# EAGLE board OBCv4.21 (EAGLE 9.6.2)
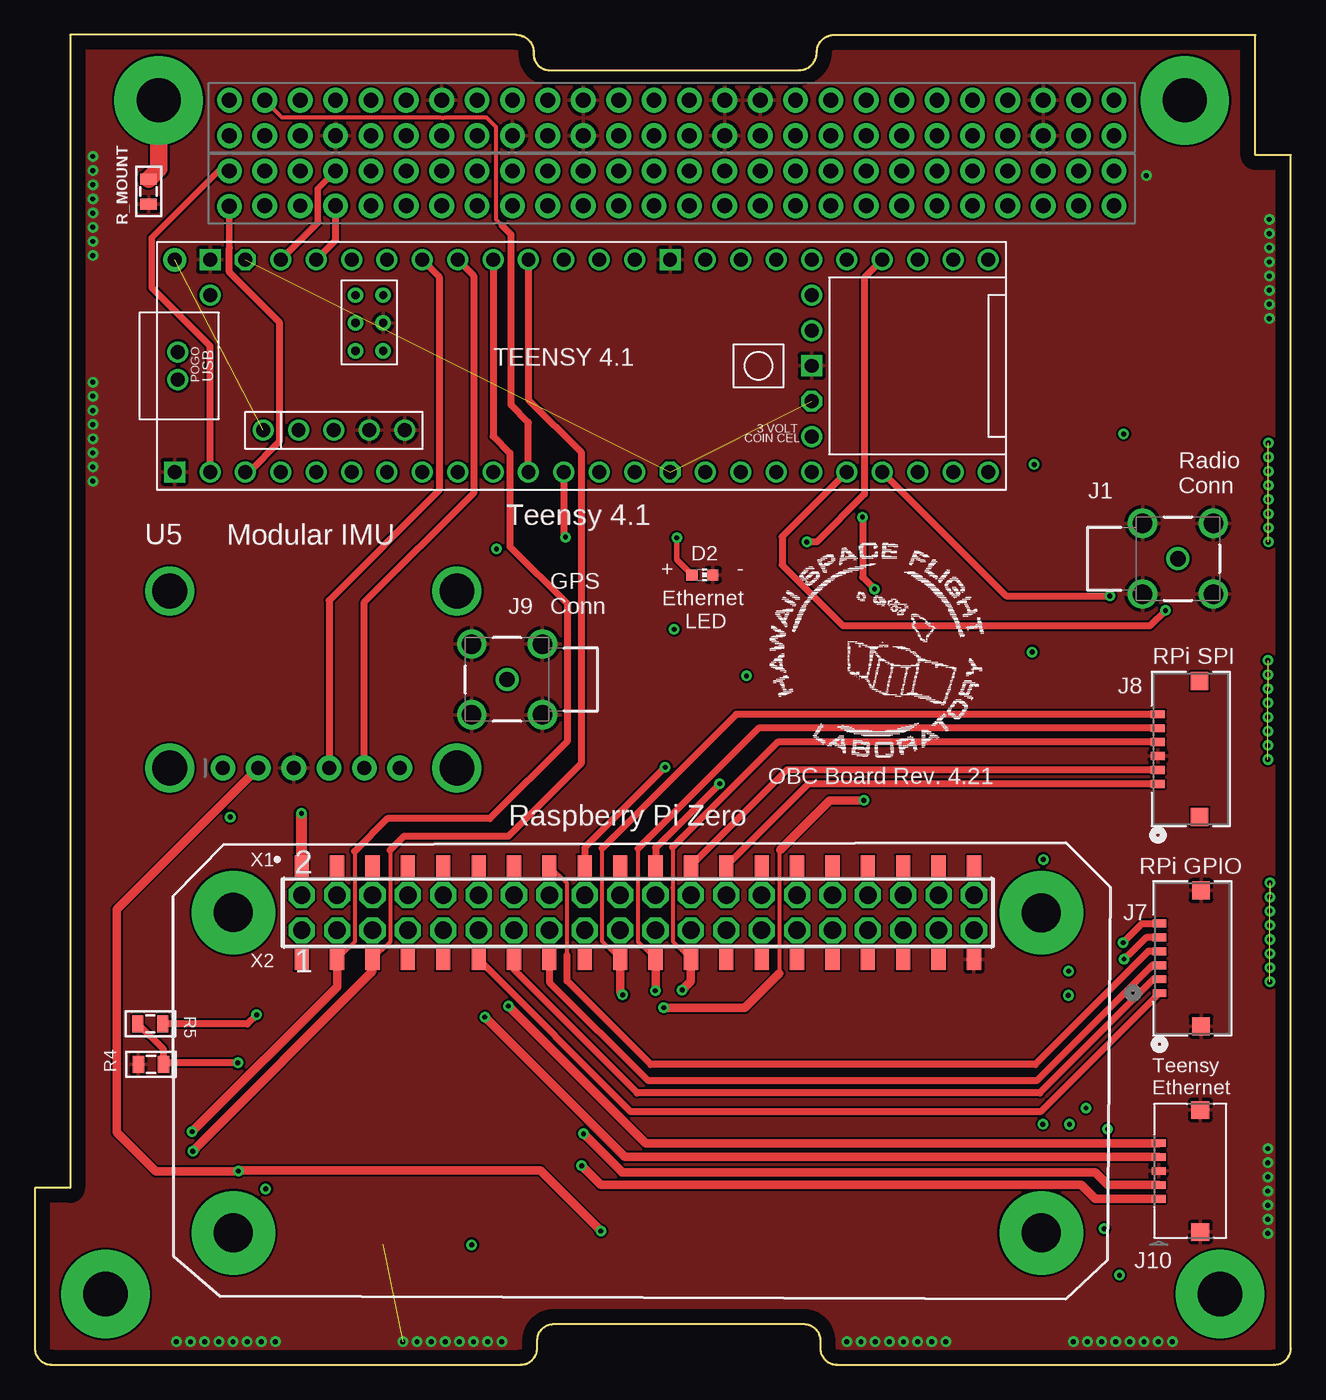
[diagram p0: board, top side]
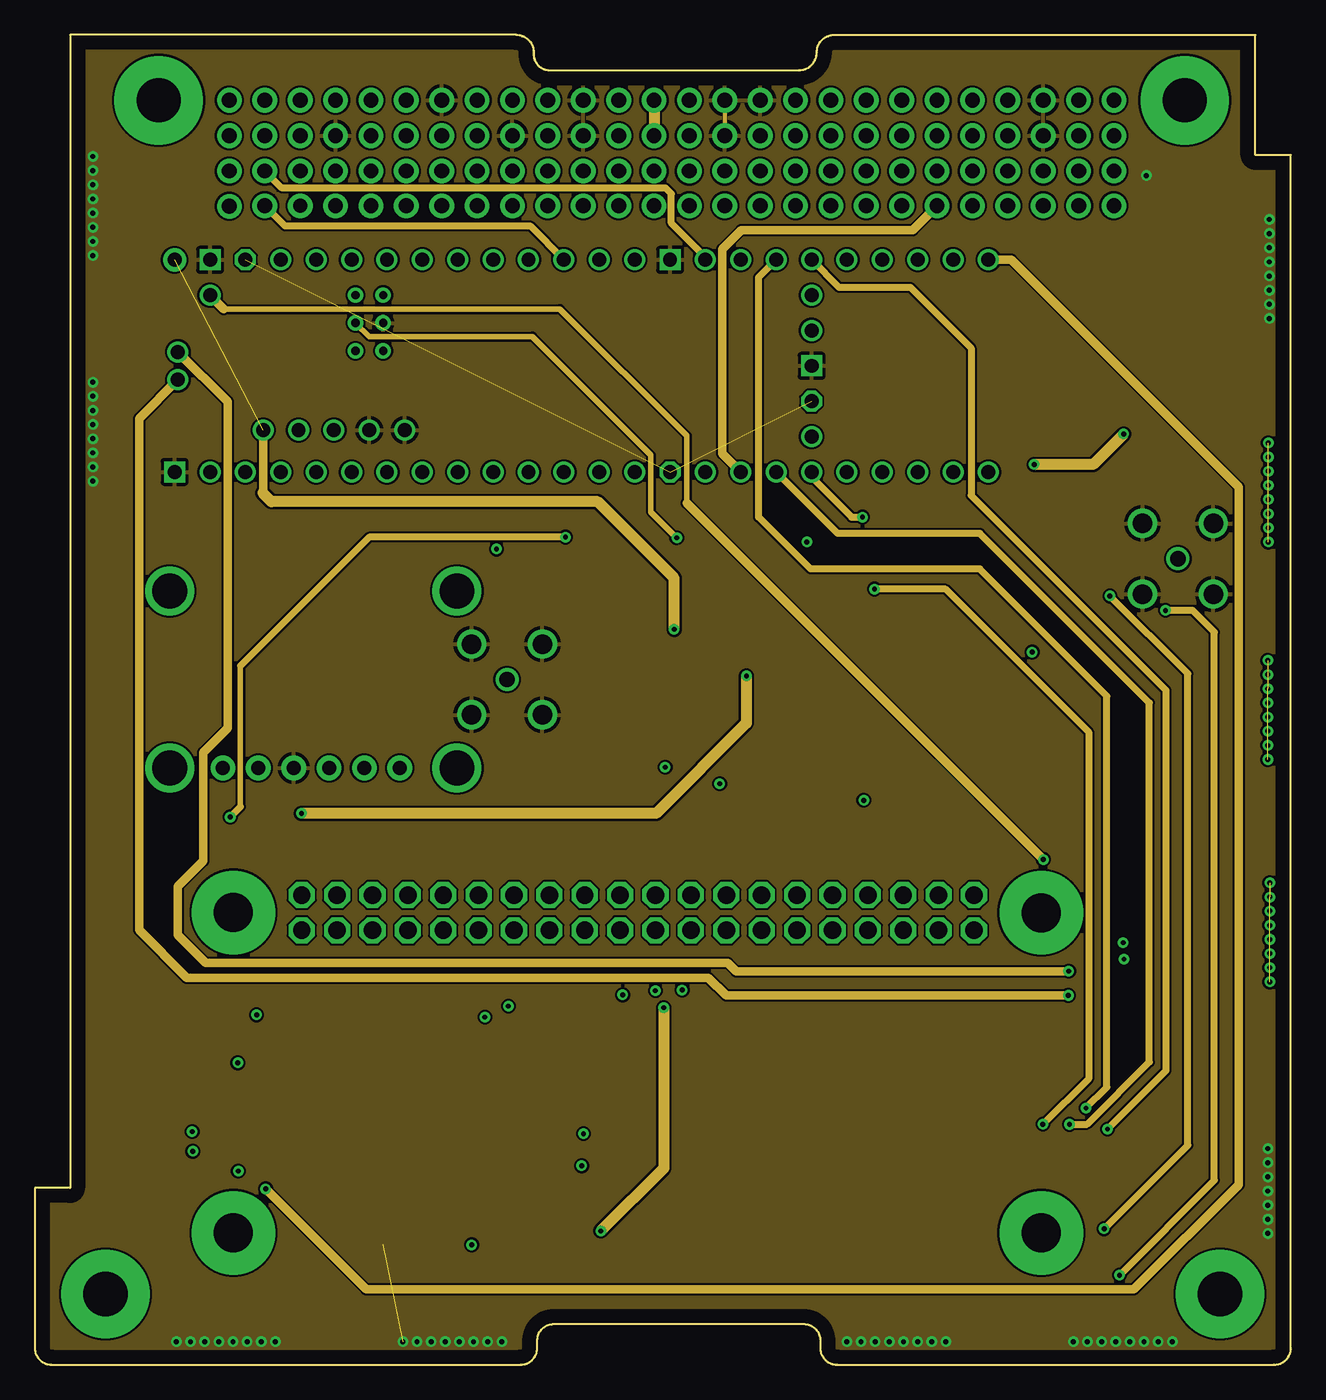
[diagram p1: board, inner layer Route2]
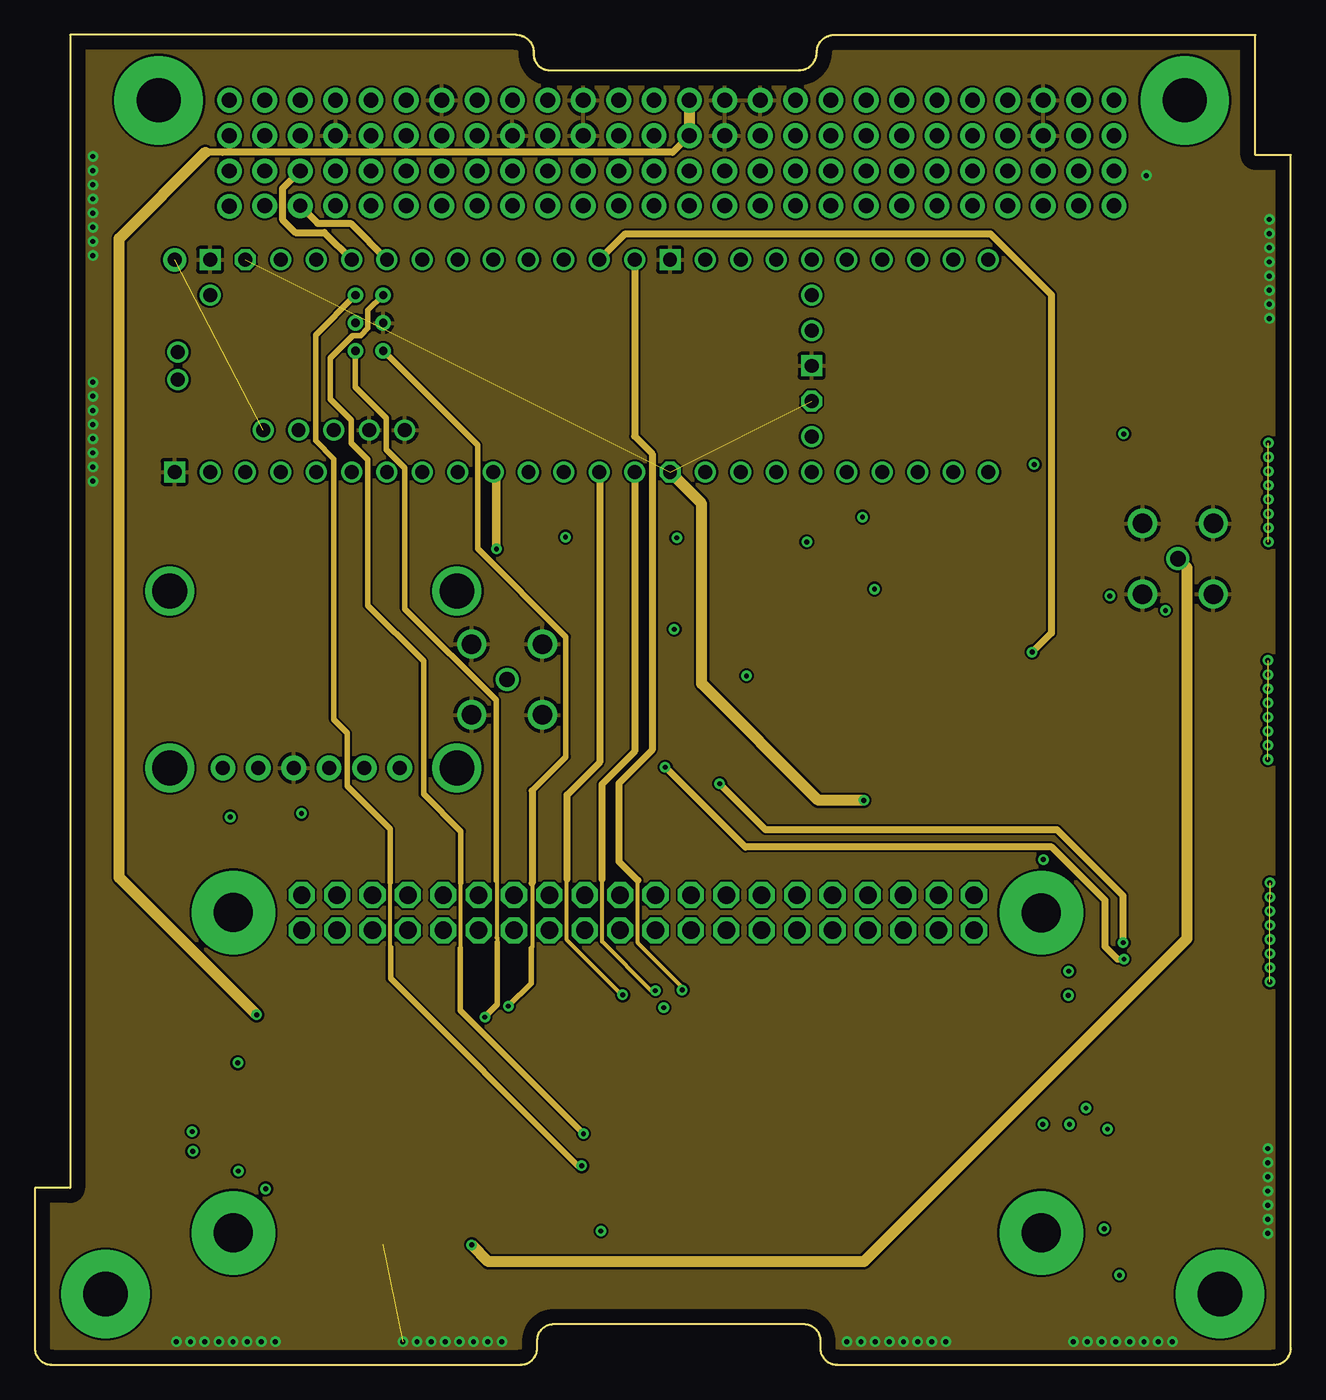
[diagram p2: board, inner layer Route15]
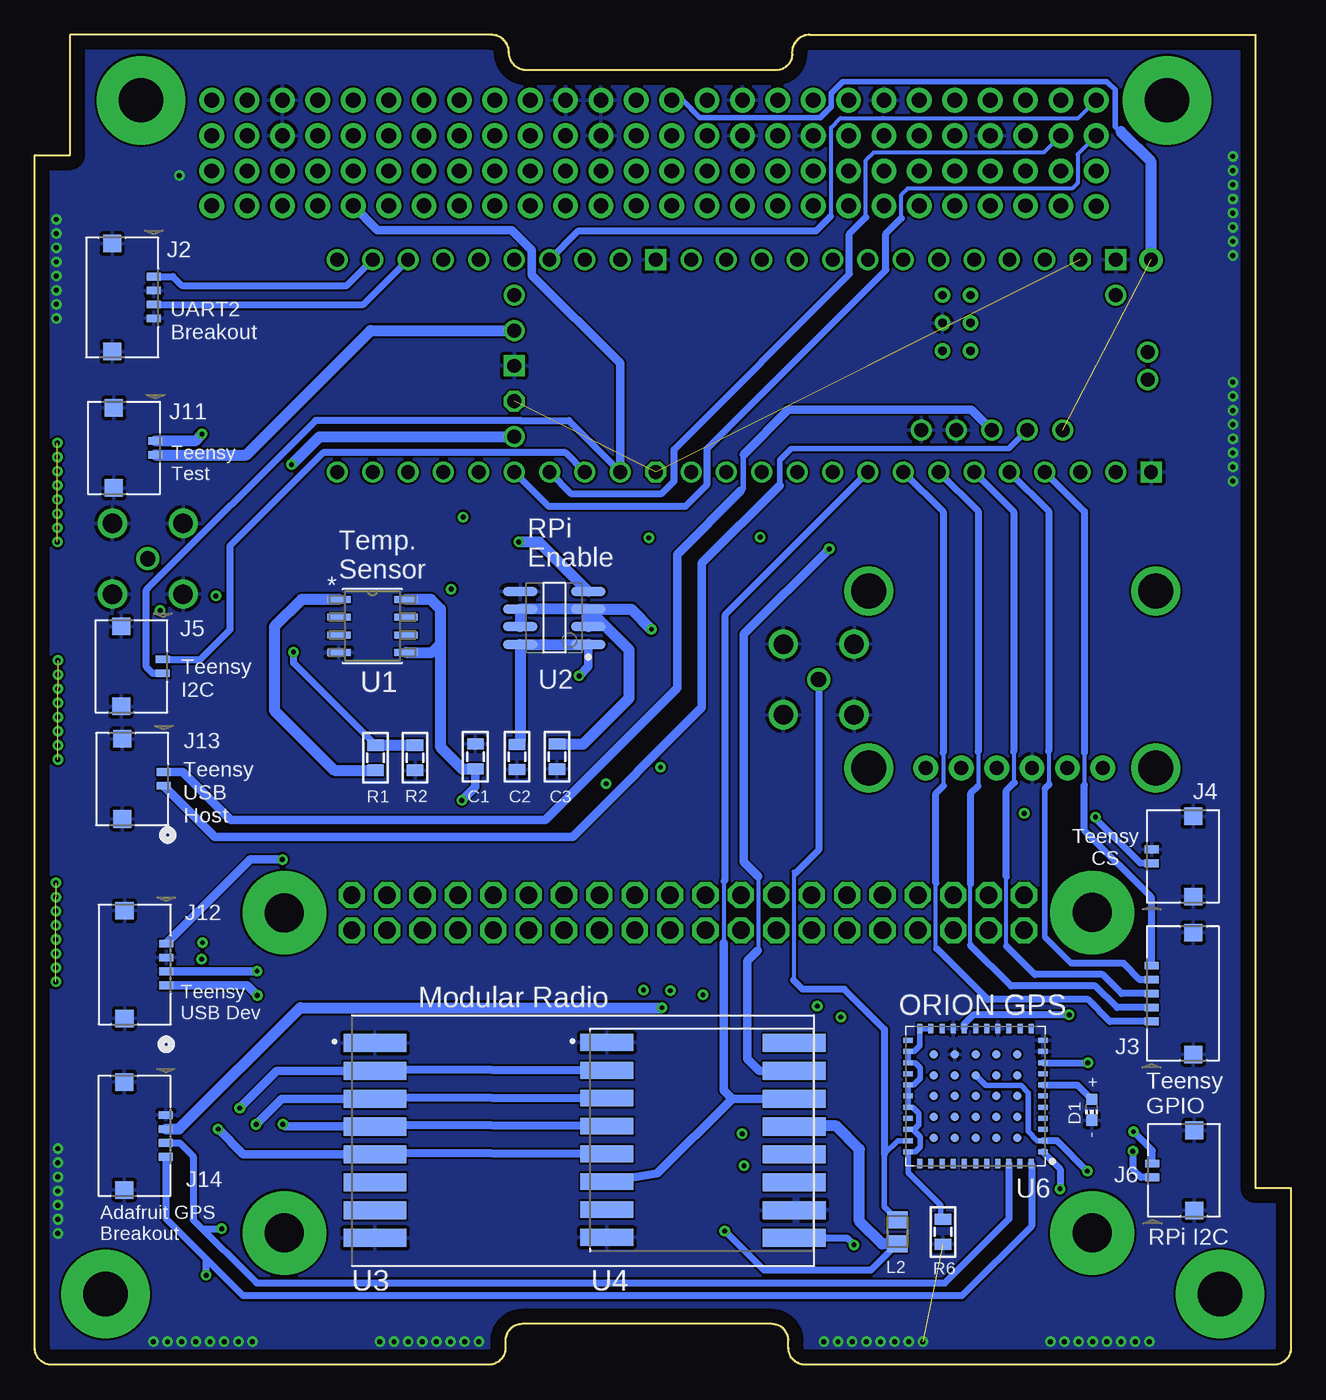
[diagram p3: board, bottom side, seen from below]

Size 90.17 x 95.5 mm. Coordinates in mm from the lower left corner, seen from the top.
Copper layers (1+2*15+16): Top 0.035mm / dielectric 1.5mm / Route2 0.035mm / dielectric 0.15mm / Route15 0.035mm / dielectric 0.2mm / Bottom 0.035mm
Design rules "default *": minimum track width 6mil, minimum drill 8mil, track to track 6mil, track to pad 6mil, pad to pad 6mil, via to via 6mil, smd to smd 6mil, copper to edge 40mil, drill to drill 6mil, minimum pad ring 10mil, minimum via ring 8mil, stop-mask expansion 4mil, vias tented up to drill 0mil, thermal gap 10mil
Net classes: 1 highpower: width 0.406 mm, drill 0.483 mm; 2 lowpower: width 0.305 mm, drill 0.483 mm

## Footprints (pad centres in the part's own frame; a part is rotated, then mirrored left to right if it is on the bottom)
0805 = smd 0.8 x 1.2: 1 -0.9,0; 2 0.9,0
CHIP-LED0603 = smd 0.8 x 0.8: A 0,-0.75; C 0,0.75
PC104_WCONN = drill 1.067 pad 1.778: 1.1 13.97,83.185; 1.2 13.97,85.725; 1.3 16.51,83.223; 1.4 16.51,85.725; 1.6 19.05,85.725; 1.7 21.59,83.223; 1.8 21.59,85.725; 1.9 24.13,83.223; 1.10 24.13,85.725; 1.11 26.67,83.223; 1.12 26.67,85.725; 1.13 29.21,83.223; 1.14 29.21,85.725; 1.15 31.75,83.223; 1.16 31.75,85.725; 1.17 34.29,83.223; 1.18 34.29,85.725; 1.19 36.83,83.223; 1.20 36.83,85.725; 1.21 39.37,83.223; 1.22 39.37,85.725; 1.23 41.91,83.223; 1.24 41.91,85.725; 1.25 44.45,83.223; 1.26 44.45,85.725; 1.27 46.99,83.223; 1.28 46.99,85.725; 1.29 49.53,83.223; 1.30 49.53,85.725; 1.31 52.07,83.223; 1.32 52.07,85.725; 1.33 54.61,83.223; 1.34 54.61,85.725; 1.35 57.15,83.223; 1.36 57.15,85.725; 1.37 59.69,83.223; 1.38 59.69,85.725; 1.39 62.23,83.223; 1.40 62.23,85.725; 1.41 64.77,83.223; 1.42 64.77,85.725; 1.43 67.31,83.223; 1.44 67.31,85.725; 1.45 69.85,83.223; 1.46 69.85,85.725; 1.47 72.39,83.223; 1.48 72.39,85.725; 1.49 74.93,83.223; 1.50 74.93,85.725; 1.51 77.47,83.223; 1.52 77.47,85.725; 2.1 13.97,88.265; 2.2 13.97,90.805; 2.3 16.51,88.265; 2.4 16.51,90.805; 2.5 19.05,88.265; 2.6 19.05,90.805; 2.7 21.59,88.265; 2.8 21.59,90.805; 2.9 24.13,88.265; 2.10 24.13,90.805; 2.11 26.67,88.265; 2.12 26.67,90.805; 2.13 29.21,88.265; 2.14 29.21,90.805; 2.15 31.75,88.265; 2.16 31.75,90.805; 2.17 34.29,88.265; 2.18 34.29,90.805; 2.19 36.83,88.265; 2.20 36.83,90.805; 2.21 39.37,88.265; 2.22 39.37,90.805; 2.23 41.91,88.265; 2.24 41.91,90.805; 2.25 44.45,88.265; 2.26 44.45,90.805; 2.27 46.99,88.265; 2.28 46.99,90.805; 2.29 49.53,88.265; 2.30 49.53,90.805; 2.31 52.07,88.265; 2.32 52.07,90.805; 2.33 54.61,88.265; 2.34 54.61,90.805; 2.35 57.15,88.265; 2.36 57.15,90.805; 2.37 59.69,88.265; 2.38 59.69,90.805; 2.39 62.23,88.265; 2.40 62.23,90.805; 2.41 64.77,88.265; 2.42 64.77,90.805; 2.43 67.31,88.265; 2.44 67.31,90.805; 2.45 69.85,88.265; 2.46 69.85,90.805; 2.47 72.39,88.265; 2.48 72.39,90.805; 2.49 74.93,88.265; 2.50 74.93,90.805; 2.51 77.47,88.265; 2.52 77.47,90.805 | drill 1.016 pad 1.778: 1.5 19.05,83.223 | drill 3.175 pad 6.35: P$1 5.08,5.08; P$2 85.09,5.08; P$3 82.55,90.805; P$4 8.89,90.805
SAMTEC_MCX-J-P-H-RA-TH1 = drill 1.1: 1 0,0 | drill 1.4: S1 -2.54,2.54; S2 2.54,2.54; S3 2.54,-2.54; S4 -2.54,-2.54
CON_5037630491 = smd 0.55 x 1: 1 0,0; 2 -1,0; 3 -2,0; 4 -3,0 | smd 1.26 x 1.3: 5 2.375,2.99; 6 -5.38,2.99
CON_5037630591 = smd 0.55 x 1: 1 0,0; 2 -1,0; 3 -2,0; 4 -3,0; 5 -4,0 | smd 1.26 x 1.3: 6 2.375,2.99; 7 -6.38,2.99
CON_5037630291 = smd 0.55 x 1: 1 0,0; 2 -1,0 | smd 1.26 x 1.3: 3 2.375,2.99; 4 -3.38,2.99
CONN_503763-0691_MOL = smd 0.559 x 0.991: 1 2.5,-2.368; 2 1.5,-2.368; 3 0.5,-2.368; 4 -0.5,-2.368; 5 -1.5,-2.368; 6 -2.5,-2.368 | smd 1.295 x 1.27: 7 -4.875,0.622; 8 4.875,0.622
INDC2012X105N = smd 1.2 x 1.47: 1 -0.86,0; 2 0.86,0
R_8_ADI-L = smd 1.676 x 0.508: 1 -2.413,1.905; 2 -2.413,0.635; 3 -2.413,-0.635; 4 -2.413,-1.905; 5 2.413,-1.905; 6 2.413,-0.635; 7 2.413,0.635; 8 2.413,1.905
LINEAR_TECHNOLOGY_LTC1477CS8_2 = smd 2.5 x 0.7: 1 -2.45,1.905; 2 -2.45,0.635; 3 -2.45,-0.635; 4 -2.45,-1.905; 5 2.45,-1.905; 6 2.45,-0.635; 7 2.45,0.635; 8 2.45,1.905
RFM23BP = smd 4.5 x 1.3: 1 -14.55,7; 2 -14.55,5; 3 -14.55,3; 4 -14.55,1; 5 -14.55,-1; 6 -14.55,-3; 7 -14.55,-5; 8 -14.55,-7; 9 15.55,-7; 10 15.55,-5; 11 15.55,-3; 12 15.55,-1; 13 15.55,1; 14 15.55,3; 15 15.55,5; 16 15.55,7
RFM69HCW = smd 3.8 x 1.2: 1 1.8,15.55; 2 1.8,13.55; 3 1.8,11.55; 4 1.8,9.55; 5 1.8,7.55; 6 1.8,5.55; 7 1.8,3.55; 8 1.8,1.55; 9 15.5,1.55; 10 15.5,3.55; 11 15.5,5.55; 12 15.5,7.55; 13 15.5,9.55; 14 15.5,11.55; 15 15.5,13.55; 16 15.5,15.55
1X06_ROUND_70 = drill 1 pad 1.778: 1 -6.35,0; 2 -3.81,0; 3 -1.27,0; 4 1.27,0; 5 3.81,0; 6 6.35,0
ORION_A38L = smd 0.7 x 0.36: 1 -4.84,4; 2 -4.84,3.2; 3 -4.84,2.4; 4 -4.84,1.6; 5 -4.84,0.8; 6 -4.84,0; 7 -4.84,-0.8; 8 -4.84,-1.6; 9 -4.84,-2.4; 10 -4.84,-3.2; 11 -4.84,-4; 23 4.84,-4; 24 4.84,-3.2; 25 4.84,-2.4; 26 4.84,-1.6; 27 4.84,-0.8; 28 4.84,0; 29 4.84,0.8; 30 4.84,1.6; 31 4.84,2.4; 32 4.84,3.2; 33 4.84,4 | smd 0.36 x 0.7: 12 -4,-4.84; 13 -3.2,-4.84; 14 -2.4,-4.84; 15 -1.6,-4.84; 16 -0.8,-4.84; 17 0,-4.84; 18 0.81,-4.84; 19 1.6,-4.84; 20 2.4,-4.84; 21 3.2,-4.84; 22 4,-4.84; 34 4,4.84; 35 3.2,4.84; 36 2.4,4.84; 37 1.6,4.84; 38 0.8,4.84; 39 0,4.84; 40 -0.8,4.84; 41 -1.6,4.84; 42 -2.4,4.84; 43 -3.18,4.84; 44 -4,4.84 | smd 0.6 x 0.6: 45 -3,3; 46 -3,1.5; 47 -3,0; 48 -3,-1.5; 49 -3,-3; 50 -1.5,3; 51 -1.5,1.5; 52 -1.5,0; 53 -1.5,-1.5; 54 -1.5,-3; 55 0,3; 56 0,1.5; 57 0,0; 58 0,-1.5; 59 0,-3; 60 1.5,3; 61 1.5,1.5; 62 1.5,0; 63 1.5,-1.5; 64 1.5,-3; 65 3,3; 66 3,1.5; 67 3,0; 68 3,-1.5; 69 3,-3
TEENSY41 = drill 1: 0-RX1/CS1/CRX2 -27.94,-7.62; 1-TX1/MISO1/CTX2 -25.4,-7.62; 2-OUT2 -22.86,-7.62; 3-LRCLK2 -20.32,-7.62; 4-BCLK2 -17.78,-7.62; 5-IN2 -15.24,-7.62; 6-OUT1D -12.7,-7.62; 7-RX2/OUT1A -10.16,-7.62; 8-TX2/IN1 -7.62,-7.62; 9-OUT1C -5.08,-7.62; 10-CS\MQSR -2.54,-7.62; 11-MOSI/CTX1 0,-7.62; 12-MISO/MQSL 2.54,-7.62; 13-SCK/LED 2.54,7.62; 14-A0/TX3/SPDIF_OUT 0,7.62; 15-A1/RX3/SPDIF_IN -2.54,7.62; 16-A2/RX4/SCL1 -5.08,7.62; 17-A3/TX4/SDA1 -7.62,7.62; 18-A4/SDA0 -10.16,7.62; 19-A5/SCL0 -12.7,7.62; 20-A6/TX5/LRCLK1 -15.24,7.62; 21-A7/RX5/BCLK1 -17.78,7.62; 22-A8/CTX1 -20.32,7.62; 23-A9/CRX1/MCLK1 -22.86,7.62; 24-A10/TX6/SCL2 7.62,-7.62; 25-A11/RX6/SDA2 10.16,-7.62; 26-A12/MOSI1 12.7,-7.62; 27-A13/SCK1 15.24,-7.62; 28-RX7 17.78,-7.62; 29-TX7 20.32,-7.62; 30-CRX3 22.86,-7.62; 31-CTX3 25.4,-7.62; 32-OUT1B 27.94,-7.62; 33-MCLK2 27.94,7.62; 34-RX8 25.4,7.62; 35-TX8 22.86,7.62; 36-PWM 20.32,7.62; 37-PWM 17.78,7.62; 38-A14/CS/IN1 15.24,7.62; 39-A15/CS/OUT1A 12.7,7.62; 40-A16/CS1 10.16,7.62; 41-A17/MISO1 7.62,7.62; +5V -24.13,-4.62; D+ -30.25,-1; D- -30.25,1; DM -21.59,-4.62; DP -19.05,-4.62; GND4 -16.51,-4.62; GND5 -13.97,-4.62; ON/OFF 15.24,5.08; PROGRAM 15.24,2.54; VBAT 15.24,-5.08; VUSB -27.94,5.08 | drill 1 octagon: 3V3-1 5.08,-7.62; 3V3-2 15.24,-2.54; 3V3-3 -25.4,7.62 | drill 0.6: G -15.51,3.08; LED -17.51,3.08; R+ -17.51,5.08; R- -15.51,5.08; T+ -15.51,1.08; T- -17.51,1.08 | drill 1 square: GND1 -30.48,-7.62; GND2 15.24,0; GND3 5.08,7.62; GND6 -27.94,7.62 | drill 1 pad 1.676: VIN -30.48,7.62
ADAFRUIT_C25582-40G-M36-0A_0 = smd 1.02 x 1.524: 1 -24.13,-3.354; 2 -24.13,3.354; 3 -21.59,-3.354; 4 -21.59,3.354; 5 -19.05,-3.354; 6 -19.05,3.354; 7 -16.51,-3.354; 8 -16.51,3.354; 9 -13.97,-3.354; 10 -13.97,3.354; 11 -11.43,-3.354; 12 -11.43,3.354; 13 -8.89,-3.354; 14 -8.89,3.354; 15 -6.35,-3.354; 16 -6.35,3.354; 17 -3.81,-3.354; 18 -3.81,3.354; 19 -1.27,-3.354; 20 -1.27,3.354; 21 1.27,-3.354; 22 1.27,3.354; 23 3.81,-3.354; 24 3.81,3.354; 25 6.35,-3.354; 26 6.35,3.354; 27 8.89,-3.354; 28 8.89,3.354; 29 11.43,-3.354; 30 11.43,3.354; 31 13.97,-3.354; 32 13.97,3.354; 33 16.51,-3.354; 34 16.51,3.354; 35 19.05,-3.354; 36 19.05,3.354; 37 21.59,-3.354; 38 21.59,3.354; 39 24.13,-3.354; 40 24.13,3.354
SSW-120-02-G-D = drill 1.25 pad 1.4 octagon: 1 -24.13,-1.27; 2 -24.13,1.27; 3 -21.59,-1.27; 4 -21.59,1.27; 5 -19.05,-1.27; 6 -19.05,1.27; 7 -16.51,-1.27; 8 -16.51,1.27; 9 -13.97,-1.27; 10 -13.97,1.27; 11 -11.43,-1.27; 12 -11.43,1.27; 13 -8.89,-1.27; 14 -8.89,1.27; 15 -6.35,-1.27; 16 -6.35,1.27; 17 -3.81,-1.27; 18 -3.81,1.27; 19 -1.27,-1.27; 20 -1.27,1.27; 21 1.27,-1.27; 22 1.27,1.27; 23 3.81,-1.27; 24 3.81,1.27; 25 6.35,-1.27; 26 6.35,1.27; 27 8.89,-1.27; 28 8.89,1.27; 29 11.43,-1.27; 30 11.43,1.27; 31 13.97,-1.27; 32 13.97,1.27; 33 16.51,-1.27; 34 16.51,1.27; 35 19.05,-1.27; 36 19.05,1.27; 37 21.59,-1.27; 38 21.59,1.27; 39 24.13,-1.27; 40 24.13,1.27

## Placement (x,y rotation side)
C1  0.1 uF  [0805]  58.54,43.67 90 bottom
C2  1 uF  [0805]  55.56,43.65 270 bottom
C3  1 uF  [0805]  52.69,43.67 270 bottom
D1  [CHIP-LED0603]  14.3,18.31 180 bottom
D2  [CHIP-LED0603]  47.93,56.72 270 top
H1  PC104_WCONN  [PC104_WCONN]  0,0 0 top
J1  MCX-J-P-H-RA-TH1  [SAMTEC_MCX-J-P-H-RA-TH1]  82.06,57.88 270 top
J2  5037630491  [CON_5037630491]  81.63,78.14 90 bottom
J3  5037630591  [CON_5037630591]  10,24.65 270 bottom
J4  5037630291  [CON_5037630291]  10,36 270 bottom
J5  5037630291  [CON_5037630291]  80.98,50.65 90 bottom
J6  5037630291  [CON_5037630291]  9.94,13.45 270 bottom
J7  503763-0691  [CONN_503763-0691_MOL]  83.1,29.18 270 top
J8  5037630691  [CONN_503763-0691_MOL]  82.99,44.21 270 top
J9  MCX-J-P-H-RA-TH1  [SAMTEC_MCX-J-P-H-RA-TH1]  33.9,49.21 90 top
J10  5037630591  [CON_5037630591]  80.68,11.91 270 top
J11  5037630291  [CON_5037630291]  81.51,66.34 90 bottom
J12  5037630491  [CON_5037630491]  80.74,30.24 90 bottom
J13  5037630291  [CON_5037630291]  80.91,42.57 90 bottom
J14  5037630491  [CON_5037630491]  80.76,17.93 90 bottom
L2  AIMC-0805-2N2S-T  [INDC2012X105N]  28.25,9.54 90 bottom
R1  45.3k  [0805]  65.71,43.59 270 bottom
R2  10k  [0805]  62.88,43.59 90 bottom
R4  0  [0805]  8.34,21.57 0 top
R5  0  [0805]  8.29,24.47 180 top
R6  0  [0805]  24.98,9.54 270 bottom
R_MOUNT  1M  [0805]  8.17,84.24 270 top
U1  TMP36FSZR_8_ADI-L  [R_8_ADI-L]  65.93,53.05 0 bottom
U2  LTC1477CS8LINEAR_TECHNOLOGY_LTC1477CS8_0_2  [LINEAR_TECHNOLOGY_LTC1477CS8_2]  52.88,53.63 180 bottom
U3  RFM23BP  [RFM23BP]  51.2,16.1 0 bottom
U4  RFM69HCW  [RFM69HCW]  50.9,7.59 0 bottom
U5  [1X06_ROUND_70]  19.85,42.86 0 top
U6  ORION_A38LORION_A38L  [ORION_A38L]  22.64,19.29 180 bottom
U$1  TEENSY41  [TEENSY41]  40.52,71.73 0 top
X1  C25582-40G-M36-0A  [ADAFRUIT_C25582-40G-M36-0A_0]  43.29,32.46 0 top
X2  SSW-120-02-G-D  [SSW-120-02-G-D]  43.29,32.46 0 top

## Library data of the parts
C1-C3 H1 R1 R2 R4-R6 R_MOUNT = HSFL_Main_Library
D1 D2 = led
J1 J9 = OBCv4; DESCRIPTION: MCX Connector Jack, Female Socket 50Ohm Through Hole, Right Angle Solder; DIGI-KEY_PART_NUMBER: SAM10607-ND; MF: Samtec; MP: MCX-J-P-H-RA-TH1; PACKAGE: None; PURCHASE-URL: https://pricing.snapeda.com/search/part/MCX-J-P-H-RA-TH1/?ref=eda
J2 J12 J14 = OBCv4; BUILT_BY: Molex_Team; COPYRIGHT: Copyright (C) 2018 Accelerated Designs. All rights reserved; MANUFACTURER_PART_NUMBER: 5037630491; SOURCELIBRARY: Add_to_database_2021-03-17; VENDOR: Molex Connector Corporation
J3 J10 = OBCv4; COPYRIGHT: Copyright (C) 2021 Ultra Librarian. All rights reserved.; MANUFACTURER_PART_NUMBER: 5037630591; MFR_NAME: Molex Connector Corporation
J4-J6 J11 J13 = OBCv4; BUILT_BY: Molex_Team; COPYRIGHT: Copyright (C) 2018 Accelerated Designs. All rights reserved; MANUFACTURER_PART_NUMBER: 5037630291; SOURCELIBRARY: Add_to_database_2021-03-17; VENDOR: Molex Connector Corporation
J7 = Improved Molex 503763-0691; BUILT_BY: EMA_Cory; COPYRIGHT: Copyright (C) 2018 Accelerated Designs. All rights reserved; DATASHEET: https://www.digikey.com/products/en?keywords=503763-0691; MANUFACTURER_PART_NUMBER: 503763-0691; SOURCELIBRARY: Molex_2020-01-22; VENDOR: Molex Connector Corporation
J8 = OBCv4; BUILT_BY: EMA_Cory; COPYRIGHT: Copyright (C) 2018 Accelerated Designs. All rights reserved; DATASHEET: https://www.digikey.com/products/en?keywords=503763-0691; MANUFACTURER_PART_NUMBER: 503763-0691; SOURCELIBRARY: Molex_2020-01-22; VENDOR: Molex Connector Corporation
L2 = PDU; DESCRIPTION: IND 2.2nH 0.3A 100mΩ; DIGI-KEY_PART_NUMBER: 535-11562-1-ND; MF: Abracon; MP: AIMC-0805-2N2S-T; PACKAGE: 2012 Bourns
U1 = TMP36FSZR_8; COPYRIGHT: Copyright (C) 2021 Ultra Librarian. All rights reserved.; MANUFACTURER_PART_NUMBER: TMP36FSZ; MFR_NAME: Analog Devices Inc
U2 = Artemis; CIIVA_IDS: 1432281; COMPONENT_LINK_1_DESCRIPTION: Manufacturer URL; COMPONENT_LINK_1_URL: http://www.linear.com/; COMPONENT_LINK_3_DESCRIPTION: Package Specification; COMPONENT_LINK_3_URL: http://cds.linear.com/docs/en/packaging/05081610_G_SO8.pdf; DATASHEET: http://cds.linear.com/docs/en/datasheet/lt1477.pdf; FOOTPRINT_VARIANT_NAME_0: Level C; FOOTPRINT_VARIANT_NAME_1: Level B; FOOTPRINT_VARIANT_NAME_2: Level A; IMPORTED: yes; IMPORTED_FROM: vault; IMPORT_TS: 1521843574; MF: Linear Technology; MOUNTING_TECHNOLOGY: Surface Mount; MPN: LTC1477CS8; PACKAGE: S8-8; PACKAGE_DESCRIPTION: 8-Pin Plastic Small Outline (Narrow .150 Inch), Body 4.9 x 3.9 mm, Pitch 1.27 mm; PACKAGE_VERSION: Rev. G, 03/2012; PREFIX: U; RELEASE_DATE: 1377817843; ROHS: No; VAULT_GUID: 635B2D7C-EC07-409E-A57F-666E02CD64AC; VAULT_REVISION: 6B8B57C2-2CB3-4970-A31A-1EB58B636423
U3 U4 = RFM RADIOS
U5 = microbuilder
U6 = Artemis
U$1 = OBCv4
X1 = Adafruit - C25582-40G-M36-0A
X2 = con-samtec-edited; MF: Samtec Inc.; MPN: SSW-120-02-G-D; OC_FARNELL: unknown; OC_NEWARK: 11P9639

## Nets
3V3_BUS: H1.2.27 H1.2.28 R5.1 U6.18
5V_BUS: C3.1 H1.2.25 H1.2.26 U2.2 U2.3 U2.6 U2.7 U$1.+5V U$1.VIN
+3V3_VCC: C1.1 J14.2 L2.1 U1.5 U1.8 U3.13 U4.13 U5.2 U6.2 U6.58 U$1.3V3-1 U$1.3V3-2 U$1.3V3-3
AIN0: R1.1 R2.2 U$1.14-A0/TX3/SPDIF_OUT
AIN1: H1.1.3 U$1.15-A1/RX3/SPDIF_IN
AIN2: H1.1.4 U$1.41-A17/MISO1
AIN3: H1.1.5 U$1.20-A6/TX5/LRCLK1
AIN4: H1.1.6 U$1.21-A7/RX5/BCLK1
AIN5: H1.1.7 U$1.22-A8/CTX1
AIN6: H1.1.8 U$1.23-A9/CRX1/MCLK1
ANT_CONN: J1.1 U3.9 U4.9
DIO1: U3.15 U4.15 U$1.8-TX2/IN1
ETH_RX+: J10.1 U$1.R+
ETH_RX-: J10.2 U$1.R-
ETH_TX+: J10.5 U$1.T+
ETH_TX-: J10.4 U$1.T-
GND: C1.2 C2.2 C3.2 D1.C D2.C H1.2.7 H1.2.14 H1.2.17 H1.2.21 H1.2.22 H1.2.29 H1.2.30 H1.2.32 H1.2.47 H1.2.48 J1.S1 J1.S2 J1.S3 J1.S4 J2.2 J2.4 J2.5 J2.6 J3.6 J3.7 J4.2 J4.3 J4.4 J5.3 J5.4 J6.3 J6.4 J7.7 J7.8 J8.3 J9.S1 J9.S2 J9.S3 J9.S4 J10.3 J10.6 J10.7 J11.3 J11.4 J12.2 J12.5 J12.6 J13.3 J13.4 J14.1 J14.5 J14.6 R2.1 R4.1 R6.2 R_MOUNT.2 U1.4 U2.5 U3.1 U3.8 U3.10 U4.1 U4.8 U4.10 U5.3 U6.10 U6.11 U6.15 U6.19 U6.64 U$1.G U$1.GND1 U$1.GND2 U$1.GND3 U$1.GND4 U$1.GND5 U$1.GND6 X1.39
GPIO17: J7.1 X1.11
GPIO22: J7.3 X1.15
GPIO23: J7.4 X1.16
GPIO24: J7.5 X1.18
GPIO25: J7.6 X1.22
GPIO27: J7.2 X1.13
GPS_RSTN: U6.1 U$1.33-MCLK2
I2C1_SCL: H1.1.43 J5.2 U$1.24-A10/TX6/SCL2
I2C1_SDA: H1.1.41 J5.1 U$1.25-A11/RX6/SDA2
I2C2_SCL: U5.4 U$1.19-A5/SCL0
I2C2_SDA: U5.5 U$1.18-A4/SDA0
INTM: U5.6
N$8: D2.A U$1.LED
N$15: R1.2 U1.1
N$16: R4.2 R5.2 U6.9
N$17: J9.1 L2.2 U6.32
N$21: D1.A U6.7
N$94: H1.P$4 R_MOUNT.1
RADIO_RESET: U3.14 U4.6 U$1.7-RX2/OUT1A
RF_GND: R6.1 U6.21 U6.22 U6.24 U6.25 U6.27 U6.28 U6.29 U6.31 U6.33
RPI_5V_PWR_IN: C2.1 U2.1 U2.8 X1.2
RPI_ENABLE: U2.4 U$1.36-PWM
SCL1_I2C: J6.1 U$1.16-A2/RX4/SCL1 X1.5
SDA1_I2C: J6.2 U$1.17-A3/TX4/SDA1 X1.3
SPI0_CE0_N: J8.2 X1.24
SPI0_CE1_N: J8.1 X1.26
SPI0_MISO: J8.5 U$1.12-MISO/MQSL X1.21
SPI0_MOSI: J8.6 U$1.11-MOSI/CTX1 X1.19
SPI0_SCLK: J8.4 U$1.13-SCK/LED X1.23
SPI1_CS1: U3.5 U4.5 U$1.38-A14/CS/IN1
SPI1_D0: H1.2.2 U3.2 U4.2 U$1.39-A15/CS/OUT1A
SPI1_D1: H1.2.3 U3.3 U4.3 U$1.26-A12/MOSI1
SPI1_SCLK: H1.2.1 U3.4 U4.4 U$1.27-A13/SCK1
T_CS: J4.1 U$1.10-CS\MQSR
T_CS1: H1.2.4 U$1.9-OUT1C
T_GPIO2: J3.5 U$1.2-OUT2
T_GPIO3: J3.4 U$1.3-LRCLK2
T_GPIO4: J3.3 U$1.4-BCLK2
T_GPIO5: J3.2 U$1.5-IN2
T_GPIO6: J3.1 U$1.6-OUT1D
T_PROGRAM: J11.2 U$1.PROGRAM
T_VBAT: J11.1 U$1.VBAT
T_VUSB: J12.1 U$1.VUSB
UART2_RXD: J2.1 U$1.34-RX8
UART2_TXD: J2.3 U$1.35-TX8
UART4_RXD: H1.1.2 U$1.0-RX1/CS1/CRX2
UART4_TXD: H1.1.1 U$1.1-TX1/MISO1/CTX2
UART5_RXD: J14.3 U6.42 U$1.29-TX7
UART5_TXD: J14.4 U6.44 U$1.28-RX7
USB_DEV_D+: J12.4 U$1.D+
USB_DEV_D-: J12.3 U$1.D-
USB_HOST_D+: J13.1 U$1.DP
USB_HOST_D-: J13.2 U$1.DM

## Tracks (layer width: path | path; a pad name or v marks a point on that pad's centre or on a via)
3V3_BUS  (via drill 0.35)
  Top 0.5: v15.92,25.13 15.26,24.47 R5.1
  Route15 0.5: 12.25,87.07 13.46,87.07 13.47,87.06 45.79,87.06 H1.2.27
  Route15 0.8: H1.2.28 H1.2.27 | v15.92,25.13 6.06,34.99 6.06,80.88 12.25,87.07
  Bottom 0.5: v15.92,25.13 22.79,25.13 23.45,24.47 U6.18
5V_BUS  (via drill 0.35)  (1 unrouted)
  Route2 0.6: U$1.+5V 16.39,62.58 16.37,62.6
  Route2 0.8: H1.2.26 H1.2.25 | v45.9,52.81 45.9,56.49 40.41,61.98 16.99,61.98 16.37,62.6
  Bottom 0.4: H1.2.26 43.67,90.81 42.42,89.56 33.78,89.56 32.99,90.35 32.99,91.32 32.16,92.14 13.21,92.14 12.62,91.55 12.62,88.9 12.27,88.55 12.21,88.55
  Bottom 0.8: U$1.VIN 10.04,86.38 12.21,88.55 | U2.2 U2.3 | U2.3 U2.6 U2.7 | C3.1 50.8,44.57 47.51,47.86 47.51,51.34 U2.3 | U2.3 47.35,54.26 v45.9,52.81
+3V3_VCC  (via drill 0.35)  (2 unrouted)
  Top 0.3: 53.5,36.96 53.43,36.89 53.43,28.11
  Top 0.6: U5.2 5.87,32.69 5.87,16.7 8.67,13.9 v14.61,13.9 14.66,13.95 36.29,13.95 v40.64,9.6 | v59.51,40.53 57.07,40.53 53.5,36.96 | v45.15,25.64 50.96,25.64 53.43,28.11
  Route2 0.8: v45.15,25.64 45.15,14.11 v40.64,9.6
  Route15 0.8: v59.51,40.53 56.25,40.53 47.87,48.91 47.87,61.84 U$1.3V3-1
  Bottom 0.4: U6.58 21.9,20.05 19.37,20.05 18.85,19.53 18.85,16.75 18.19,16.09 U6.2
  Bottom 0.5: v40.64,9.6 37.84,6.8 30.13,6.8 L2.1 | U6.2 16.81,16.1 v14.61,13.9 | U3.13 35.61,17.14 35.54,17.21 U4.13
  Bottom 0.6: C1.1 58.54,41.5 v59.51,40.53
  Bottom 0.8: U1.8 61.74,54.95 61.06,54.27 61.06,51.71 | U1.5 61.63,51.14 61.06,51.71 | 61.06,51.71 61.06,44.36 59.47,42.77 C1.1 | J14.2 79.82,16.93 71.11,25.64 v45.15,25.64 | L2.1 29.35,8.68 30.97,10.3 30.97,15.48 32.63,17.14 35.61,17.14
AIN0  (via drill 0.35)
  Route15 0.5: U$1.14-A0/TX3/SPDIF_OUT 42.39,81.22 68.59,81.22 72.97,76.84 72.97,52.54 v71.6,51.17
  Bottom 0.5: R1.1 71.6,50.38 v71.6,51.17
  Bottom 0.8: R1.1 R2.2
AIN1
  Route2 0.5: H1.1.3 17.95,81.78 35.55,81.78 U$1.15-A1/RX3/SPDIF_IN
AIN2
  Route2 0.5: H1.1.4 17.73,84.5 45.29,84.5 45.7,84.09 45.7,81.96 48.14,79.52 U$1.41-A17/MISO1
AIN3
  Route15 0.5: H1.1.5 20.31,81.96 22.67,81.96 U$1.20-A6/TX5/LRCLK1
AIN4
  Route15 0.5: H1.1.6 17.78,84.45 17.78,82.23 18.7,81.31 20.78,81.31 U$1.21-A7/RX5/BCLK1
AIN5
  Top 0.5: U$1.22-A8/CTX1 21.59,80.74 H1.1.7
AIN6
  Top 0.45: H1.1.8 20.32,84.46 20.32,82.12
  Top 0.5: 20.32,82.12 20.32,82.01 U$1.23-A9/CRX1/MCLK1
ANT_CONN  (via drill 0.35)
  Route15 0.8: J1.1 82.7,57.24 82.7,30.59 59.51,7.4 32.56,7.4 v31.36,8.6
  Bottom 0.5: v31.36,8.6 31.86,9.1 U3.9 35.54,9.21 U4.9
DIO1  (via drill 0.35)
  Route15 0.6: U$1.8-TX2/IN1 33.14,63.87 v33.14,58.58
  Bottom 0.3: 38.24,35.07 38.24,29.78 38.28,29.74
  Bottom 0.6: U4.15 35.44,21.1 35.5,21.1 U3.15 38.17,21.1 39.03,21.96 39.03,28.99 38.28,29.74 | v33.14,58.58 39.26,52.46 39.26,36.09 38.24,35.07
ETH_RX+  (via drill 0.35)
  Top 0.6: J10.1 76.12,11.91 75.12,12.91 40.64,12.91 v39.26,14.29
  Route15 0.3: 25.55,29.95 25.51,29.99 25.51,34.65
  Route15 0.4: v39.26,14.29 38.99,14.29 25.55,27.73 25.55,29.95 | U$1.R+ 20.15,73.95 20.15,66.35 21.47,65.03 21.47,46.32 22.43,45.36 22.43,41.54 25.51,38.46 25.51,34.65
ETH_RX-  (via drill 0.35)
  Top 0.6: J10.2 77.04,12.91 76.12,13.83 42.12,13.83 42.12,13.86 v39.39,16.59
  Route15 0.3: 30.59,34.6 30.59,29.96 30.54,29.91
  Route15 0.4: v39.39,16.59 30.54,25.44 30.54,29.91 | U$1.R- 23.92,75.72 23.92,74.44 23.39,73.9 22.82,73.9 21.21,72.29 21.21,69.34 22.71,67.84 22.71,66.18 23.9,65 23.9,54.53 27.91,50.52 27.91,40.98 30.59,38.3 30.59,34.6
ETH_TX+  (via drill 0.35)
  Top 0.6: J10.5 43.84,15.91 v34,25.75
  Route15 0.3: 35.7,34.58 35.7,29.98 35.63,29.91
  Route15 0.4: v34,25.75 35.63,27.38 35.63,29.91 | 35.7,41.22 38.13,43.65 38.13,52.26 31.78,58.61 31.78,66.04 U$1.T+
  Route15 0.5: 35.7,41.22 35.7,34.58
ETH_TX-  (via drill 0.35)
  Top 0.6: J10.4 42.36,14.91 v32.31,24.96
  Route15 0.3: 33.21,30.33 33.21,30.63 33.16,30.68 33.16,34.72 33.11,34.77
  Route15 0.4: U$1.T- 23.01,70.22 25.24,67.99 25.24,65.72 26.57,64.39 26.57,54.27 33.11,47.73 33.11,34.77 | v32.31,24.96 33.21,25.86 33.21,30.33
GND  (via drill 0.35)  (1 unrouted)
  Route2 0.305: H1.2.30 H1.2.29
  other vias: 10.16,1.65 12.19,1.65 13.21,1.65 14.22,1.65 15.24,1.65 16.26,1.65 17.27,1.65 11.18,1.65 26.42,1.65 27.43,1.65 28.45,1.65 29.46,1.65 30.48,1.65 31.5,1.65 32.51,1.65 33.53,1.65 4.17,79.65 4.17,81.69 4.17,82.7 4.17,83.72 4.17,84.73 4.17,85.75 4.17,86.77 4.17,80.67 4.17,63.45 4.17,65.48 4.17,66.5 4.17,67.51 4.17,68.53 4.17,69.55 4.17,70.56 4.17,64.47 58.29,1.65 60.33,1.65 61.34,1.65 62.36,1.65 63.37,1.65 64.39,1.65 65.41,1.65 59.31,1.65 74.55,1.65 75.56,1.65 76.58,1.65 77.6,1.65 78.61,1.65 79.63,1.65 80.64,1.65 81.66,1.65 88.52,9.42 88.52,11.46 88.52,12.47 88.52,13.49 88.52,14.5 88.52,15.52 88.52,10.44 88.62,75.13 88.62,77.17 88.62,78.18 88.62,79.2 88.62,80.21 88.62,81.23 88.62,82.25 88.62,76.15 79.8,85.4
  pour Top: 92.52,-5.29 92.52,98.21 -4.78,98.21 -4.78,-5.29
  pour Bottom: -5.78,98.91 -5.78,-6.19 93.22,-6.19 93.22,98.91
  pour Route2: 93.4,98.2 0.6,98.2 -3,98.2 -3,-5.8 93.4,-5.8
  pour Route15: 91.4,97 -3.8,97 -3.8,-3.2 91.4,-3.2
GND1  (via drill 0.35)  (7 unrouted)
  other vias: 88.66,27.49 88.66,29.53 88.66,30.54 88.66,31.56 88.66,32.57 88.66,33.59 88.66,34.61 88.66,28.51
GND2  (via drill 0.35)  (7 unrouted)
  other vias: 88.55,59.08 88.55,61.12 88.55,62.13 88.55,63.15 88.55,64.16 88.55,65.18 88.55,66.2 88.55,60.1
GND3  (via drill 0.35)  (7 unrouted)
  other vias: 88.52,43.46 88.52,45.5 88.52,46.51 88.52,47.53 88.52,48.54 88.52,49.56 88.52,50.58 88.52,44.48
GPIO17
  Top 0.5: X1.11 42.8,18.17 72.21,18.17 79.34,25.3 79.35,25.3 J7.1
GPIO22
  Top 0.5: X1.15 36.94,27.47 43.99,20.42 71.97,20.42 80.23,28.68 J7.3
GPIO23
  Top 0.3: 38.21,29.41 38.21,34.54 X1.16
  Top 0.5: J7.4 79.94,29.68 71.82,21.56 44.21,21.56 38.21,27.56 38.21,29.41
GPIO24  (via drill 0.35)
  Top 0.5: J7.5 79.77,30.68 78.49,29.4 78.47,29.4 v78.19,29.12 | v45.25,42.91 39.48,37.14 X1.18
  Route15 0.5: v78.19,29.12 77.73,29.12 76.83,30.02 76.83,33.35 73.01,37.17 51.01,37.17 45.27,42.91 v45.25,42.91
GPIO25  (via drill 0.35)
  Top 0.5: v78.13,30.31 79.5,31.68 J7.6 | v49.16,41.72 44.56,37.12 X1.22
  Route15 0.5: v78.13,30.31 78.13,33.67 73.39,38.41 52.47,38.41 v49.16,41.72
GPIO27
  Top 0.5: X1.13 34.4,28.36 43.24,19.52 72.14,19.52 80.3,27.68 J7.2
GPS_RSTN  (via drill 0.35)
  Route2 0.6: U$1.33-MCLK2 70.1,79.35 86.42,63.03 86.42,12.93 78.89,5.4 23.79,5.4 v16.57,12.62
  Bottom 0.5: U6.1 16.57,14.06 v16.57,12.62
I2C1_SCL
  Bottom 0.5: U$1.24-A10/TX6/SCL2 51.83,67.8 55.27,67.8 55.28,67.81 70,67.81 82.05,55.76
  Bottom 0.508: J5.2 81.72,49.65 82.16,50.09 82.16,55.65 82.05,55.76
  Bottom 0.6: H1.1.43 65.58,81.49 55.94,81.49 54.48,80.03 54.48,78.25 48.14,71.91 U$1.24-A10/TX6/SCL2
I2C1_SDA
  Route2 0.6: H1.1.41 63.03,81.48 50.7,81.48 49.34,80.12 49.34,79.86 49.35,79.85 49.35,65.44 U$1.25-A11/RX6/SDA2
  Bottom 0.5: U$1.25-A11/RX6/SDA2 52.06,65.49 69.47,65.49 76.17,58.79 76.17,52.76 78.28,50.65 J5.1
I2C2_SCL
  Top 0.5: U$1.19-A5/SCL0 29.03,78.14 29.03,62.8 21.12,54.89 U5.4
I2C2_SDA
  Top 0.5: U5.5 23.66,54.76 31.54,62.64 31.54,78.17 U$1.18-A4/SDA0
N$1  (via drill 2.5 pad 3.5)
  other vias: 30.31,55.56
N$2  (via drill 2.8 pad 6)
  other vias: 14.26,32.47
N$3  (via drill 2.5 pad 3.5)
  other vias: 9.69,42.86
N$4  (via drill 2.5 pad 3.5)
  other vias: 9.69,55.56
N$5  (via drill 2.8 pad 6)
  other vias: 72.26,32.46
N$6  (via drill 2.8 pad 6)
  other vias: 72.26,9.46
N$7  (via drill 2.8 pad 6)
  other vias: 14.26,9.46
N$8  (via drill 0.35)
  Top 0.4: D2.A 46.09,57.81 v46.09,59.38
  Route2 0.4: U$1.LED 23.99,73.83 35.71,73.83 44.23,65.31 44.23,61.24 v46.09,59.38
N$14  (via drill 2.5 pad 3.5)
  other vias: 30.31,42.86
N$15
  Bottom 0.8: R1.2 68.67,42.69 72.97,46.99 72.97,53 71.02,54.95 U1.1
N$16  (via drill 0.35)
  Top 0.5: R5.2 9.24,22.63 R4.2 9.35,21.68 v14.57,21.68
  Bottom 0.5: v14.57,21.68 v14.58,21.69 U6.9
N$17
  Bottom 0.3: 35.57,35.29 35.69,35.41 35.69,27.6
  Bottom 0.4: L2.2 29.18,11.33 29.18,15.13 28.22,16.09 U6.32
  Bottom 0.5: J9.1 33.9,36.96 35.57,35.29 | 29.18,15.13 29.18,24.08 32.06,26.96 35.05,26.96 35.69,27.6
N$21
  Bottom 0.5: U6.7 15.32,20.09 D1.A
N$94
  Top 1.27: H1.P$4 8.91,85.88 R_MOUNT.1
RADIO_RESET
  Bottom 0.3: 40.7,34.72 40.72,34.7 40.72,30.3
  Bottom 0.5: U$1.7-RX2/OUT1A 40.64,53.83 40.64,34.78 40.7,34.72
  Bottom 0.6: U4.6 45.47,13.75 40.12,19.1 | 40.72,30.3 40.72,19.7 40.12,19.1 | 40.12,19.1 U3.14
RF_GND
  Bottom 0.4: U6.21 U6.22 26.64,22.89 27.04,22.49 U6.24 U6.25 26.97,21.69 26.59,21.31 26.59,20.58 27.08,20.09 U6.27 U6.28 U6.29 27.16,18.49 26.71,18.04 26.71,17.22 27.04,16.89 U6.31 27.15,16.89 26.61,16.35 26.61,15.63 26.95,15.29 U6.33 27.48,13.79 25.14,11.45 25.14,10.44
  Bottom 0.5: 25.14,10.44 R6.1
RPI_5V_PWR_IN  (via drill 0.35)
  Top 0.8: v19.14,39.59 19.14,35.83 X1.2
  Route2 0.8: v51.09,49.47 51.09,46.08 44.6,39.59 v19.14,39.59
  Bottom 0.6: U2.1 50.43,50.13 v51.09,49.47
  Bottom 0.8: U2.1 U2.8 55.33,44.78 C2.1
RPI_ENABLE  (via drill 0.35)
  Top 0.5: U$1.36-PWM 59.55,78.06 59.55,62.51 56.13,59.09 v55.42,59.09
  Bottom 0.8: U2.4 53.99,59.09 v55.42,59.09
SCL1_I2C  (via drill 0.35)
  Top 0.3: X1.5 25.51,30.38 25.51,36.96
  Top 0.5: U$1.16-A2/RX4/SCL1 35.44,69.32 39.22,65.54 39.22,43.17 33.99,37.94 26.49,37.94 25.51,36.96
  Top 0.6: X1.5 24.24,28.23 v11.34,15.33
  Bottom 0.5: J6.1 10.75,13.45 11.34,14.04 v11.34,15.33
SDA1_I2C  (via drill 0.35)
  Top 0.3: X1.3 22.95,30.36 22.95,36.86
  Top 0.5: U$1.17-A3/TX4/SDA1 32.9,66.68 34.11,65.47 34.11,58.75 38.21,54.65 38.21,44.75 32.67,39.21 25.3,39.21 22.95,36.86
  Top 0.6: X1.3 21.7,27.14 v11.3,16.74
  Bottom 0.5: v11.3,16.74 9.94,15.38 J6.2
SPI0_CE0_N
  Top 0.5: J8.2 54,42.71 X1.24
SPI0_CE1_N
  Top 0.5: J8.1 55.54,41.71 X1.26
SPI0_MISO  (via drill 0.35)
  Top 0.3: X1.21 43.31,30.36 43.31,37.06
  Top 0.5: J8.5 51.96,45.71 43.31,37.06
  Top 0.6: X1.21 v44.56,26.87 v44.55,26.86
  Route15 0.3: v44.55,26.86 44.25,26.86 40.72,30.39 40.72,34.86
  Route15 0.5: U$1.12-MISO/MQSL 43.06,44.04 40.72,41.7 40.72,34.86
SPI0_MOSI  (via drill 0.35)
  Top 0.3: 40.72,37.09 40.72,30.41 X1.19
  Top 0.5: J8.6 50.34,46.71 40.72,37.09
  Top 0.6: X1.19 42.02,26.74 v42.2,26.56
  Route15 0.3: v42.2,26.56 42.12,26.56 38.19,30.49 38.19,34.83 38.22,34.86
  Route15 0.5: U$1.11-MOSI/CTX1 40.55,64.08 40.55,43.25 38.22,40.92 38.22,34.86
SPI0_SCLK  (via drill 0.35)
  Top 0.3: 45.79,37.17 45.79,34.25 45.8,34.24 45.8,30.41 X1.23
  Top 0.5: J8.4 53.33,44.71 45.79,37.17
  Top 0.6: X1.23 47.1,27.54 v46.47,26.91
  Route15 0.3: v46.47,26.91 46.47,27.11 43.29,30.29 43.29,34.78
  Route15 0.5: U$1.13-SCK/LED 43.06,66.67 44.31,65.42 44.31,44.13 41.93,41.75 41.93,36.14 43.29,34.78
SPI1_CS1  (via drill 0.35)
  Route2 0.5: v77.01,16.92 81.22,21.13 81.22,48.42 67.22,62.42 67.22,73.02 62.86,77.38 57.73,77.38 U$1.38-A14/CS/IN1
  Bottom 0.6: v77.01,16.92 75.19,15.1 U3.5 65.64,15.21 U4.5
SPI1_D0  (via drill 0.35)
  Route2 0.5: v75.46,18.43 76.96,19.93 76.96,48.02 67.84,57.14 55.69,57.14 51.96,60.87 51.96,78.09 U$1.39-A15/CS/OUT1A
  Bottom 0.3: 33.05,82.45 33.01,82.49 33.01,88.85 32.34,89.52 29.3,89.52 15.26,89.52 H1.2.2
  Bottom 0.5: U$1.39-A15/CS/OUT1A 51.15,81.42 34.08,81.42 33.05,82.45
  Bottom 0.6: v75.46,18.43 72.79,21.1 U3.2 65.64,21.21 U4.2
SPI1_D1  (via drill 0.35)
  Route2 0.5: v74.28,17.26 75.54,17.26 80.01,21.73 80.01,47.53 67.85,59.69 57.64,59.69 U$1.26-A12/MOSI1
  Bottom 0.3: H1.2.3 17.73,87.05 29.95,87.05 30.51,86.49 30.51,82.39
  Bottom 0.5: U$1.26-A12/MOSI1 51.68,62.57 45.16,62.57 44.28,63.45 44.28,65.73 31.69,78.32 31.69,81.21 30.51,82.39
  Bottom 0.6: v74.28,17.26 72.44,19.1 U3.3 65.64,19.21 U4.3
SPI1_SCLK  (via drill 0.35)
  Top 0.5: v59.42,60.87 59.42,56.56 v60.28,55.7
  Route2 0.5: v72.37,17.27 75.68,20.58 75.68,45.4 65.38,55.7 v60.28,55.7 | U$1.27-A13/SCK1 55.76,63.75 58.64,60.87 v59.42,60.87
  Bottom 0.3: H1.2.1 15.31,86.92 15.31,84.86 15.71,84.46 27.52,84.46 27.96,84.02 27.96,82.33
  Bottom 0.5: U$1.27-A13/SCK1 53.31,61.66 43.45,61.66 41.9,63.21 41.9,65.79 29.07,78.62 29.07,81.22 27.96,82.33
  Bottom 0.6: v72.37,17.27 72.2,17.1 U3.4 65.64,17.21 U4.4
T_CS  (via drill 0.35)
  Top 0.5: U$1.10-CS\MQSR 37.98,59.55 v38.1,59.43
  Route2 0.4: 14.76,50.19 14.76,40.06
  Route2 0.5: v38.1,59.43 24,59.43 14.76,50.19 | 14.76,40.06 v14.03,39.33
  Bottom 0.5: J4.1 10.79,36 14.03,39.24 v14.03,39.33
T_CS1
  Top 0.3: H1.2.4 17.73,89.58 29.12,89.58 29.3,89.52 29.42,89.58 32.41,89.58 33.1,88.89 33.1,82.25 33.55,81.8
  Top 0.5: U$1.9-OUT1C 35.44,67.67 34.19,68.92 34.19,81.16 33.55,81.8
T_GPIO2
  Bottom 0.3: 14.83,43.94 14.83,41.65
  Bottom 0.5: J3.5 10,33.54 14.83,38.37 14.83,41.65 | U$1.2-OUT2 14.83,61.28 14.83,43.94
T_GPIO3
  Bottom 0.3: 17.39,44.05 17.39,41.71 17.36,41.68
  Bottom 0.4: 17.66,41.38 17.66,30.73 15.75,28.82
  Bottom 0.5: 17.36,41.68 17.66,41.38 | U$1.3-LRCLK2 17.39,61.3 17.39,44.05 | J3.4 10.84,27.65 12.01,28.82 15.75,28.82
T_GPIO4
  Bottom 0.3: 20.42,30.06 20.42,35.04 | 19.91,44.02 19.91,41.87 19.85,41.81
  Bottom 0.5: 20.42,35.04 20.42,41.24 19.85,41.81 | U$1.4-BCLK2 19.91,61.28 19.91,44.02 | J3.3 12.15,26.65 13.52,28.02 18.38,28.02 20.42,30.06
T_GPIO5
  Bottom 0.3: 23,30.12 23,34.5 | 22.46,44.01 22.46,41.56
  Bottom 0.5: 22.46,41.56 23,41.02 23,34.5 | U$1.5-IN2 22.46,61.29 22.46,44.01 | J3.2 12.48,25.65 14.03,27.2 20.08,27.2 23,30.12
T_GPIO6
  Bottom 0.3: 25.44,29.89 25.48,29.93 25.48,34.58 | 24.96,43.94 24.96,41.63 24.92,41.59
  Bottom 0.5: 25.48,34.58 25.48,41.03 24.92,41.59 | U$1.6-OUT1D 24.96,61.25 24.96,43.94 | J3.1 12.99,24.65 14.56,26.22 21.77,26.22 25.44,29.89
T_PROGRAM
  Bottom 0.8: J11.2 74.99,65.34 66.06,74.27 U$1.PROGRAM
T_VBAT  (via drill 0.35)
  Route2 0.8: v78.17,66.84 75.98,64.65 v71.74,64.65
  Bottom 0.8: U$1.VBAT 69.73,66.65 v71.73,64.65 v71.74,64.65 | v78.17,66.84 78.67,66.34 J11.1
T_VUSB  (via drill 0.35)
  Route2 0.4: 46.81,61.87 46.81,66.71 37.7,75.82 13.57,75.82
  Route2 0.6: v72.4,36.28 46.81,61.87 | U$1.VUSB 13.57,75.82
  Bottom 0.6: J12.1 74.7,36.28 v72.4,36.28
UART2_RXD
  Bottom 0.5: J2.1 80.26,78.14 79.62,77.5 67.77,77.5 U$1.34-RX8
UART2_TXD
  Bottom 0.5: J2.3 66.59,76.14 U$1.35-TX8
UART4_RXD
  Top 0.45: 8.4,77.34 8.4,80.95 13.18,85.72 H1.1.2
  Top 0.5: U$1.0-RX1/CS1/CRX2 12.58,73.16 8.4,77.34
UART4_TXD
  Top 0.45: 13.96,80.19 13.96,83.17 H1.1.1
  Top 0.5: U$1.1-TX1/MISO1/CTX2 15.38,64.11 17.58,66.31 17.58,74.83 13.96,78.45 13.96,80.19
UART5_RXD  (via drill 0.35)
  Top 0.5: U$1.29-TX7 69.74,55.21 v77.18,55.21
  Route2 0.5: v76.76,9.76 82.77,15.77 82.77,49.62 v77.18,55.21
  Bottom 0.5: 78.8,10.42 78.14,9.76 v76.76,9.76 | 33.33,5.87 24.84,5.87 20.24,10.47 U6.42
  Bottom 0.508: 33.33,5.87 74.25,5.87 78.8,10.42 78.8,14.97 79.76,15.93 J14.3
UART5_TXD  (via drill 0.35)
  Top 0.5: U$1.28-RX7 53.65,59.46 53.65,57.43 58.03,53.05 80.05,53.05 v81.17,54.17
  Route2 0.5: v77.87,6.43 84.68,13.24 84.68,52.61 83.12,54.17 v81.17,54.17
  Bottom 0.5: v77.87,6.43 77.87,7.61 80.76,10.5 | U6.44 18.62,14.43 18.62,9.95 23.62,4.95
  Bottom 0.508: J14.4 80.76,10.5 75.21,4.95 23.62,4.95
USB_DEV_D+  (via drill 0.35)
  Route2 0.6: v74.19,26.52 49.62,26.52 48.35,27.79 10.91,27.79 7.48,31.22 7.48,67.94 U$1.D+
  Bottom 0.6: J12.4 74.91,27.24 v74.19,26.52
USB_DEV_D-  (via drill 0.35)
  Route2 0.6: v74.22,28.26 50.34,28.26 49.74,28.86 12.26,28.86 10.26,30.86 10.26,34.33 12.1,36.17 12.1,43.97 13.84,45.71 13.84,69.16 U$1.D-
  Bottom 0.6: J12.3 74.24,28.24 v74.22,28.26
USB_HOST_D+
  Bottom 0.4: 39.29,65.37 39.31,65.35 39.31,62.93 39.48,62.76
  Bottom 0.6: J13.1 79.55,42.57 76.1,39.12 53.52,39.12 44.06,48.58 44.06,58.18 39.48,62.76 | U$1.DP 22.95,68.59 36.07,68.59 39.29,65.37
USB_HOST_D-
  Bottom 0.4: U$1.DM 20.25,65.79 35.88,65.79 36.71,64.96 36.71,63.13
  Bottom 0.6: J13.2 77.24,37.9 51.57,37.9 42.28,47.19 42.28,57.56 36.71,63.13

## Text on the board
tPlace: Teensy 4.1 | Raspberry Pi Zero
tNames: Radio / Conn | Modular IMU | + | - | GPS / Conn | Ethernet / LED | RPi SPI | OBC Board Rev. 4.21 | RPi GPIO | J7 | Teensy / Ethernet
bNames: UART2 / Breakout | Teensy / Test | RPi / Enable | Temp. / Sensor | Teensy / I2C | Teensy / USB / Host | Teensy / CS | Modular Radio | ORION GPS | Teensy / USB Dev | + | Teensy / GPIO | - | RPi I2C | Adafruit GPS / Breakout